# Altium PCB ELEC3300_DAP.PcbDoc
Units mm, origin at the board's own origin, x right, y up, seen from the top; angles counter-clockwise.
Board outline 77.34 x 94.36 mm, 2 copper layers (Top Layer, Bottom Layer); 75 components, 92 nets, 357 pads, 379 vias.
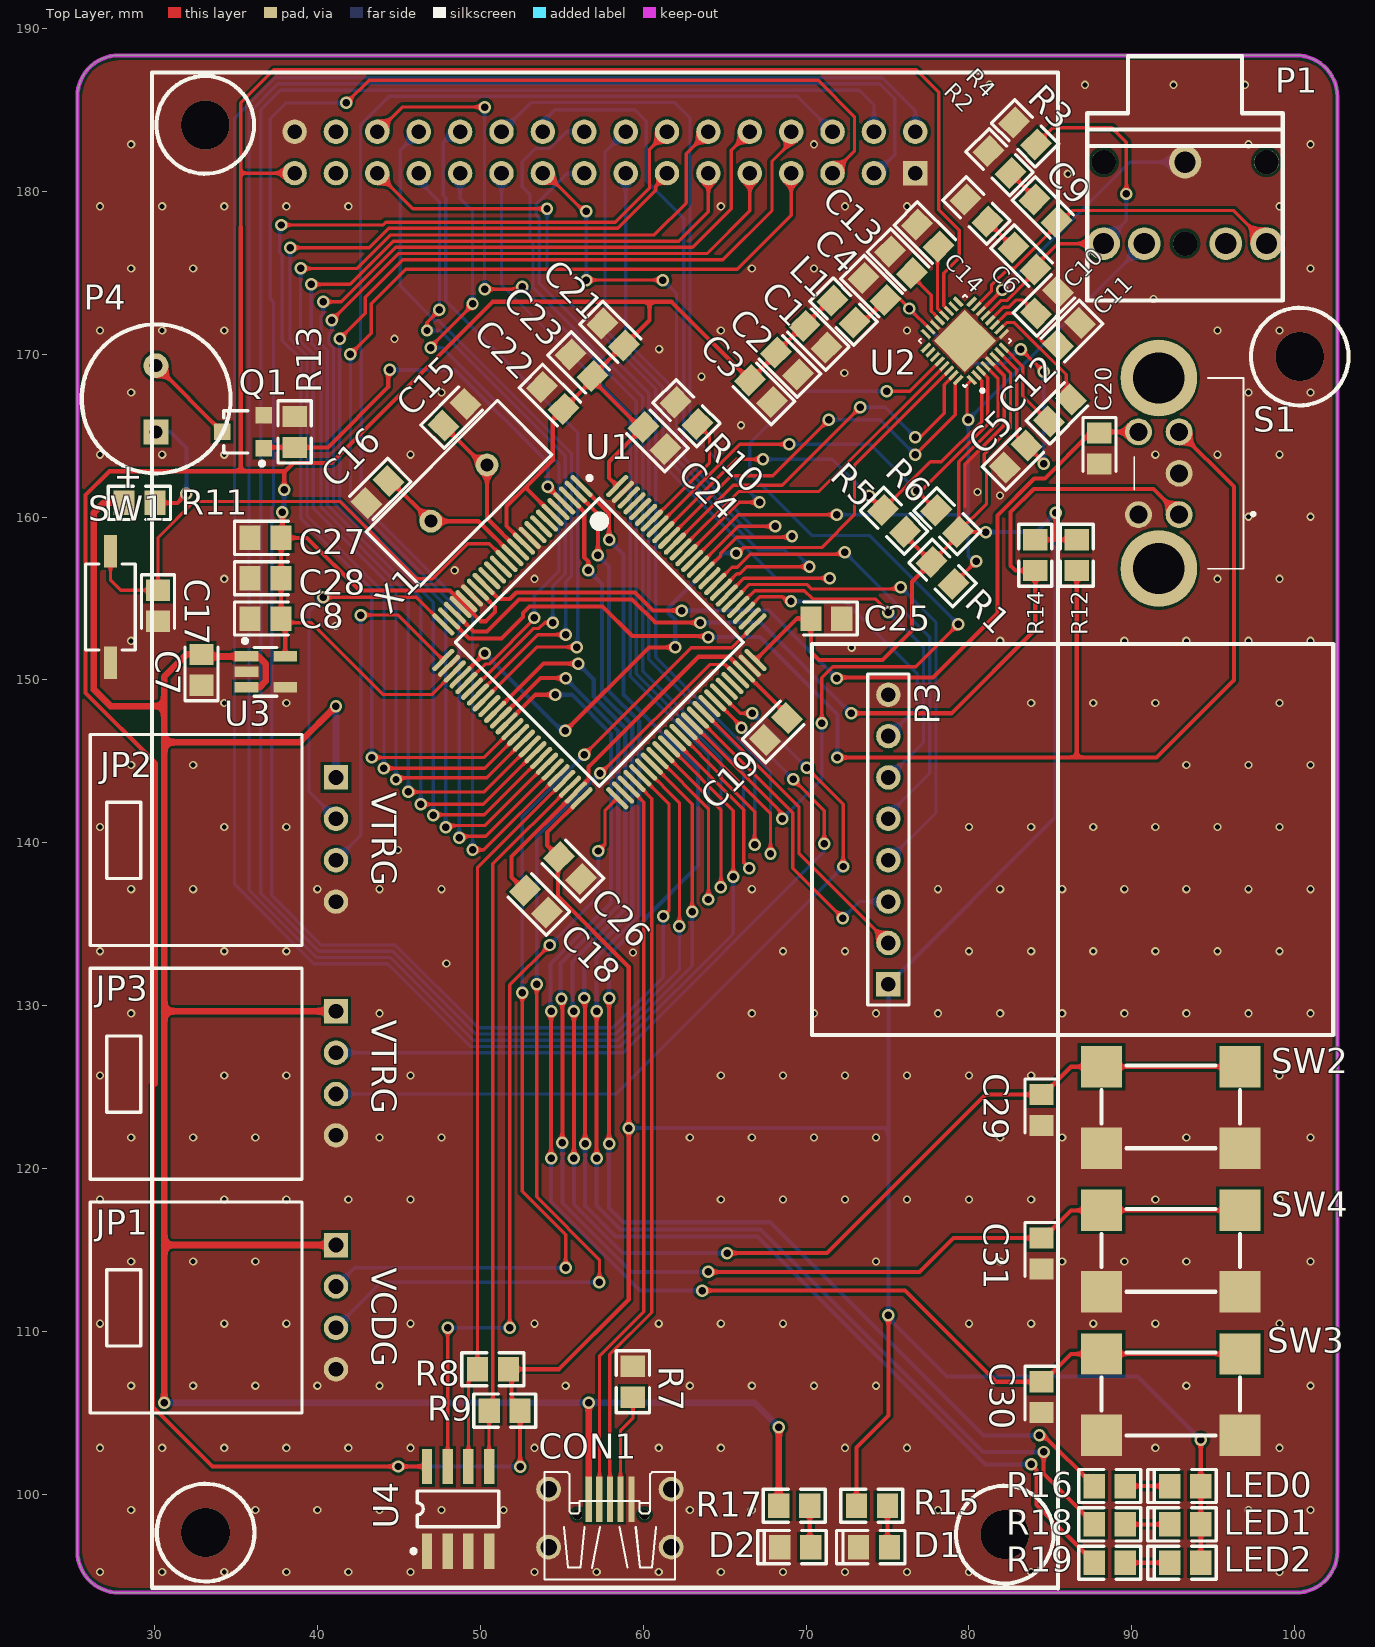
[diagram p0: Top Layer view]
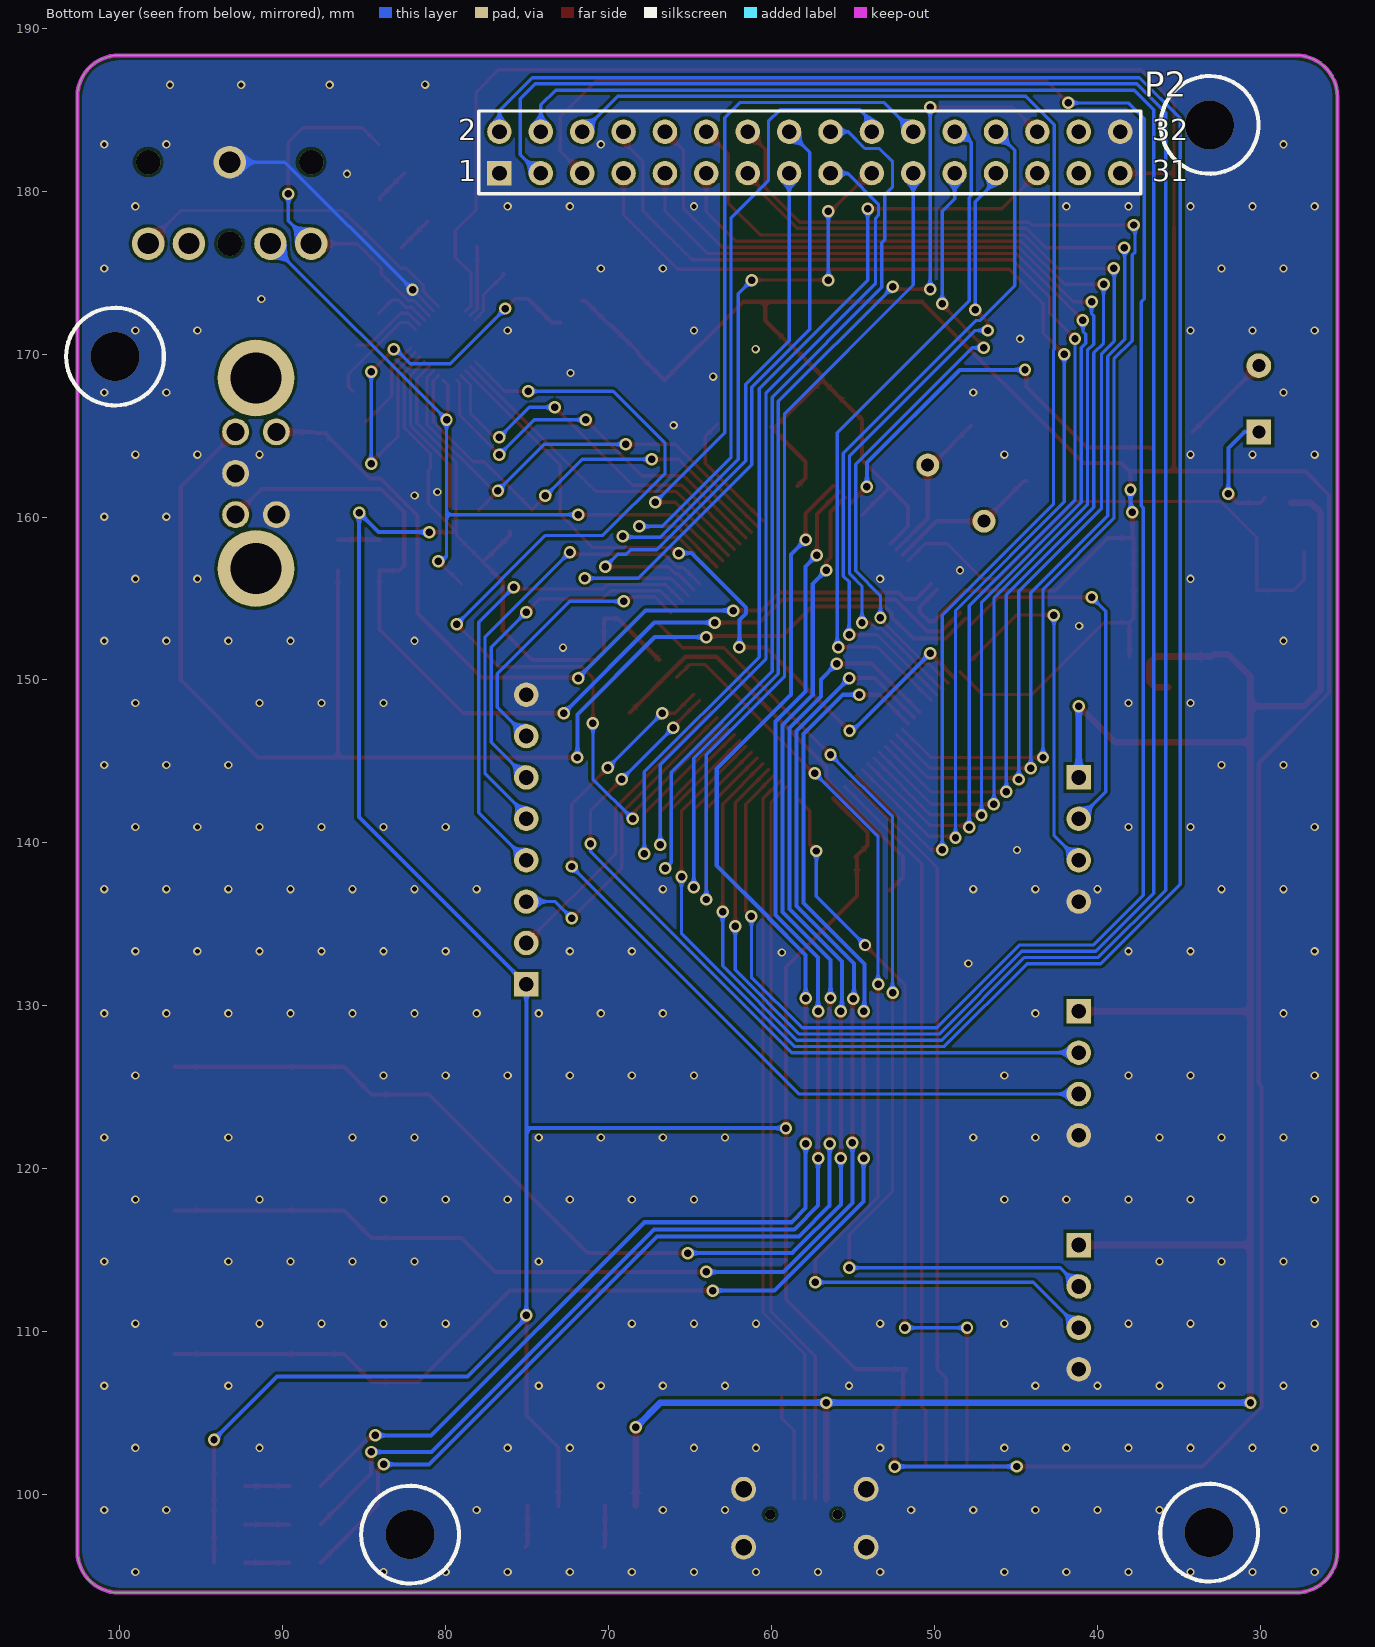
[diagram p1: Bottom Layer view, seen from below]
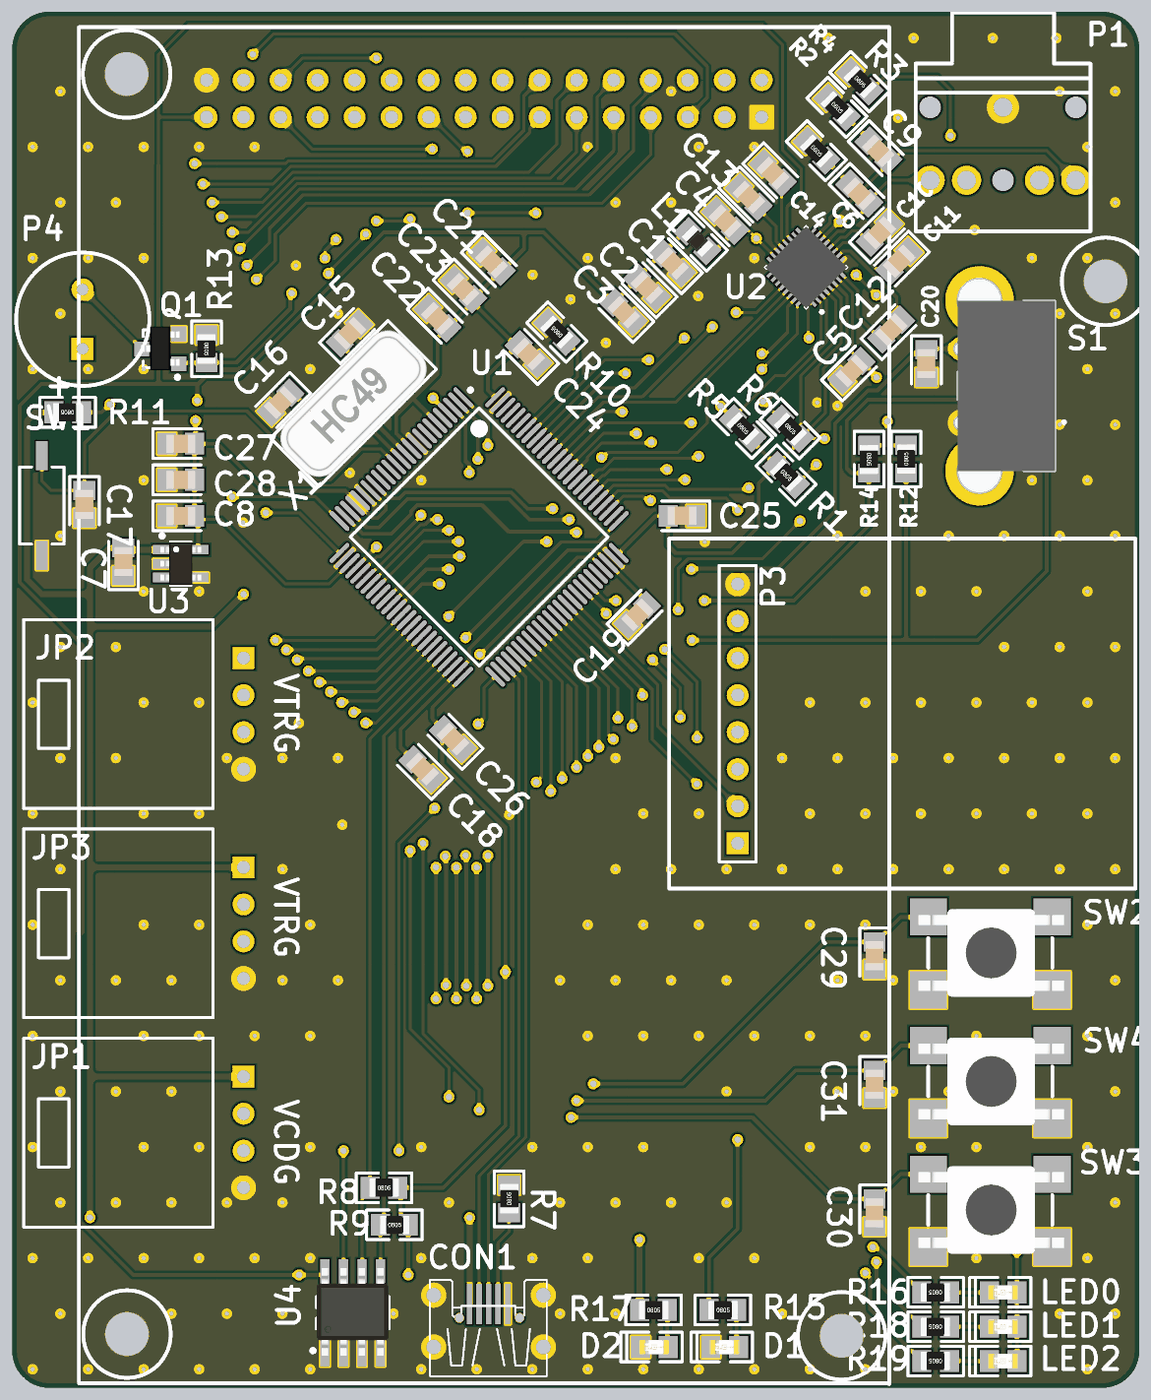
[diagram p2: 3D render of the assembled board from above, using the file's embedded part models]

## Layer stack, top to bottom
Top Solder: solder mask 0.0102, Solder Resist, Dk 3.5
Top Layer: signal copper 0.0356
Dielectric 1: dielectric 0.32, FR-4, Dk 4.8
Bottom Layer: signal copper 0.0356
Bottom Solder: solder mask 0.0102, Solder Resist, Dk 3.5

## Board outline
27.813,188.341 ccw(c27.813,185.801) 25.273,185.801 25.273,96.52 ccw(c27.813,96.52) 27.813,93.98 100.076,93.98 ccw(c100.076,96.52) 102.616,96.52 102.616,185.801 ccw(c100.076,185.801) 100.076,188.341

## Design rules (kind name [scope] priority, off if disabled: settings)
AssemblyTestPointUsage [All] p1 off:
AssemblyTestpoint [All] p1 off: testpointundercomponent=TRUE minsize=1.016 maxsize=2.54 preferedsize=1.524 minholesize=0 maxholesize=1.016 preferedholesize=0.813 testpointgrid=0.025 usegrid=TRUE gridtolerance=0 allowsidetop=TRUE allowsidebottom=TRUE
Clearance [All] p1: gap=0.178 ignorepadtopadclearanceinfootprint=FALSE except(0: Arc-Hole Track-Hole SMDPad-Hole THPad-Hole Via-Hole Fill-Hole Poly-Hole Region-Hole Text-Hole)
ComponentClearance [All] p1 off: gap=0.254 collisioncheckmode=3 verticalgap=0.254 showdistances=FALSE
DiffPairsRouting [All] p1 off: maxlimit=0.254 minlimit=0.254 mostfreqgap=0.254 toplayer_minwidth=0.381 toplayer_maxwidth=0.381 toplayer_prefwidth=0.381 bottomlayer_minwidth=0.381 bottomlayer_maxwidth=0.381 bottomlayer_prefwidth=0.381 maxuncoupledlength=12.7
FabricationTestPointUsage [All] p1 off: valid=0 allowmultiple=FALSE
FabricationTestpoint [All] p1 off: side=3 testpointundercomponent=TRUE minsize=1.016 maxsize=2.54 preferedsize=1.524 minholesize=0 maxholesize=1.016 preferedholesize=0.813 testpointgrid=0.025 allowsidetop=TRUE allowsidebottom=TRUE usegrid=TRUE gridtolerance=0
FanoutControl Fanout_BGA [IsBGA] p1 off: bgadir=Out bgaviamode=Centered fanoutstyle=Auto fanoutdirection=Alternating viagrid=0.025 // Fanout_BGA (Default Rule)
FanoutControl Fanout_LCC [IsLCC] p2 off: bgadir=Out bgaviamode=Centered fanoutstyle=Auto fanoutdirection=Alternating viagrid=0.025 // Fanout_LCC (Default Rule)
FanoutControl Fanout_SOIC [IsSOIC] p3 off: bgadir=Out bgaviamode=Centered fanoutstyle=Auto fanoutdirection=Alternating viagrid=0.025 // Fanout_SOIC (Default Rule)
FanoutControl Fanout_Small [(CompPinCount < 5)] p4 off: bgadir=Out bgaviamode=Centered fanoutstyle=Auto fanoutdirection=OutThenIn viagrid=0.025 // Fanout_Small (Default Rule)
FanoutControl Fanout_Default [All] p5 off: bgadir=Out bgaviamode=Centered fanoutstyle=Auto fanoutdirection=Alternating viagrid=0.025 // Fanout_Default (Default Rule)
Height [All] p1 off: minheight=0 maxheight=25.4 prefheight=12.7
HoleSize [All] p1: absolutevalues=TRUE maxlimit=7.62 minlimit=0.025 maxpercent=80.000 minpercent=20.000
HoleToHoleClearance [All] p1 off: gap=0.254 allowstackedmicrovias=TRUE
LayerPairs [All] p1 off: enforce=TRUE
MinimumSolderMaskSliver [All] p1 off: minsoldermaskwidth=0.254
NetAntennae [All] p1 off: netantennaetolerance=0
PasteMaskExpansion [All] p1 off: expansion=0
PlaneClearance [All] p1 off: clearance=0.508
PlaneConnect [All] p1 off: planeconnectstyle=Relief reliefexpansion=0.508 reliefentries=4 reliefconductorwidth=0.254 reliefairgap=0.254
PolygonConnect [All] p1: connectstyle=Direct reliefconductorwidth=0.254 reliefentries=4 polygonreliefangle="90 Angle" airgapwidth=0.254
RoutingCorners [All] p1 off: cornerstyle=45-Degree minsetback=2.54 maxsetback=2.54
RoutingLayers [All] p1 off: top layer_v5=TRUE bottom layer_v5=TRUE
RoutingPriority [All] p1 off: routingpriority=0
RoutingTopology [All] p1 off: topology=Shortest
RoutingVias [All] p1: holewidth=0.457 width=0.762 viastyle="Through Hole" minholewidth=0 minwidth=0 maxholewidth=0.457 maxwidth=0.762
SilkToBoardRegionClearance [All] p1 off:
SilkToSilkClearance [All] p1 off: silktosilkclearance=0.254
SilkToSolderMaskClearance [IsPad] p1 off: minsilkscreentomaskgap=0.254 clearancetoexposedcopper=TRUE
SolderMaskExpansion [All] p1 off: expansion=0.102
Width [All] p1: maxlimit=253.975 minlimit=0.178 preferedwidth=0.254
3 further rules are at their usual default settings.

## Components (designator, comment, footprint, x,y, rotation, side; value= is the part's Value field where it differs from the comment)
C1 "100nF" CC2012-0805 70.575,171.069 r135 top
C2 "100nF" CC2012-0805 68.834,169.418 r135 top
C3 "100nF" CC2012-0805 67.24,167.726 r135 top
C4 "4.7uF" CC2012-0805 74.205,174.003 r315 top
C5 "4.7uF" CC2012-0805 82.874,163.718 r45 top
C6 "100nF" CC2012-0805 83.399,175.873 r315 top
C7 "1uF" CC2012-0805 32.893,150.622 r90 top
C8 "1uF" CC2012-0805 36.83,153.772 r0 top
C9 "100nF" CC2012-0805 84.709,178.816 r315 top
C10 "2.2uF" CC2012-0805 84.791,173.179 r45 top
C11 "2.2uF" CC2012-0805 86.151,171.237 r225 top
C12 "2.2uF" CC2012-0805 85.582,166.548 r45 top
C13 "4.7uF" CC2012-0805 75.819,175.641 r315 top
C14 "4.7uF" CC2012-0805 77.47,177.292 r315 top
C15 "20pF" CC2012-0805 48.424,166.28 r45 top
C16 "20pF" CC2012-0805 43.688,161.544 r225 top
C17 "100nF" CC2012-0805 30.226,154.559 r270 top
C18 "2.2uF" CC2012-0805 53.421,136.398 r135 top
C19 "2.2uF" CC2012-0805 68.162,146.984 r45 top
C20 "100nF" CC2012-0805 88.011,164.211 r270 top
C21 "1uF" CC2012-0805 58.166,171.196 r315 top
C22 "100nF" CC2012-0805 54.453,167.317 r315 top
C23 "100nF" CC2012-0805 56.221,169.317 r315 top
C24 "100nF" CC2012-0805 60.706,164.846 r135 top
C25 "100nF" CC2012-0805 71.247,153.772 r180 top
C26 "100nF" CC2012-0805 55.514,138.453 r135 top
C27 "100nF" CC2012-0805 36.83,158.722 r0 top
C28 "100nF" CC2012-0805 36.83,156.247 r0 top
C29 "100nF" CC2012-0805 84.455,123.609 r270 top
C30 "100nF" CC2012-0805 84.455,105.98 r270 top
C31 "100nF" CC2012-0805 84.455,114.794 r270 top
CON1 "USB" USB-UB-S-HML 59.282,99.474 r90 top
D1 "LED" D0805 74.168,96.774 r180 top
D2 "LED" D0805 69.342,96.774 r180 top
JP1 "CONN0M" LOCKEDHDR-4W 41.148,111.506 r270 top
JP2 "CONN0M" LOCKEDHDR-4W 41.148,140.208 r270 top
JP3 "CONN0M" LOCKEDHDR-4W 41.148,125.857 r270 top
L1 "10uH" CL2012-0805 72.3,172.61 r315 top
LED0 "LED" D0805 93.279,100.525 r180 top (schematic designator LED1)
LED1 "LED" D0805 93.279,98.171 r180 top (schematic designator LED2)
LED2 "LED" D0805 93.279,95.817 r180 top (schematic designator LED3)
P1 "3.5mm Audio Jack" STX-3120-5B 93.265,181.784 r270 top
P2 "Header 16x2" HDR2X16 76.708,181.112 r180 bottom
P3 "Header 8" HDR1X8 75.057,131.318 r90 top
P4 "Buzzer" BUZ-9.0 30.099,167.259 r90 top
Q1 "AO3400" SO-G3/Z3.3 35.433,165.227 r90 top
R1 "10k" CR2012-0805 78.384,156.565 r315 top
R2 "10k" CR2012-0805 80.456,178.816 r315 top
R3 "100k" CR2012-0805 83.447,183.552 r315 top
R4 "10k" CR2012-0805 81.87,181.784 r315 top
R5 "10k" CR2012-0805 75.405,159.771 r315 top
R6 "10k" CR2012-0805 78.664,159.747 r315 top
R7 "10k" CR2012-0805 59.375,106.929 r90 top
R8 "10k" CR2012-0805 50.78,107.696 r0 top
R9 "10k" CR2012-0805 51.501,105.156 r0 top
R10 "10k" CR2012-0805 62.656,166.376 r135 top
R11 "33R" CR2012-0805 29.083,160.872 r180 top
R12 "10k" CR2012-0805 86.614,157.661 r90 top
R13 "10k" CR2012-0805 38.608,165.227 r270 top
R14 "10k" CR2012-0805 84.071,157.661 r270 top
R15 "2k" CR2012-0805 74.041,99.314 r0 top
R16 "2k" CR2012-0805 88.646,100.525 r180 top
R17 "5k" CR2012-0805 69.281,99.314 r0 top
R18 "2k" CR2012-0805 88.646,98.171 r180 top
R19 "2k" CR2012-0805 88.646,95.817 r180 top
S1 "EC11B15242AE" EC11B15242AE 93.853,162.687 r0 top
SW1 "RESET" "PUSH SWITCH 2-PIN" 27.305,154.479 r180 top
SW2 "RESET" "PUSH SWITCH" 88.138,121.261 r0 top
SW3 "RESET" "PUSH SWITCH" 88.138,103.632 r0 top
SW4 "RESET" "PUSH SWITCH" 88.138,112.447 r0 top
U1 "STM32F407VET6" STM-LQFP100_N 57.317,152.322 r315 top
U2 "WM8918" QFN40P400X400X80-33N 79.756,170.815 r135 top
U3 "LP5907" SOT-23-5 36.83,150.495 r270 top
U4 "AT24C02BN" SOP-8 46.736,96.52 r0 top
X1 "8MHz" BCY-W2/E4.7 48.693,161.471 r45 top

## Footprints (in the part's own frame and the unit in brackets; to place one, negate y for a bottom-side part, rotate by r counter-clockwise, add the part's x,y. Pads: shape width x height; smd on the part's side, far side on the other; paste and mask are expansions set on the pad)
BCY-W2/E4.7 [mm]
  round 1.4 hole 0.8: 1(-2.44,-0.002) 2(2.44,-0.002)
  silkscreen extent -5.7,-2.35 5.7,2.35, body extent -5.67,-2.32 5.68,2.33, height 3.6
BUZ-9.0 [mil]
  rect 60x60 hole 31.5: 1(-80,0)
  round 60 hole 31.5: 2(80,0)
  silkscreen extent -180,-181 180,179
CC2012-0805 [mm] "Chip Capacitor; Body 2.0 x 1.2 mm (LxW typ)"
  rect 1.3x1.5 smd: 1(-0.95,0) 2(0.95,0)
  silkscreen extent -1.91,-1.02 1.4,1.02, body extent -0.99,-0.64 1.01,0.62, height 0.58
CL2012-0805 [mm] "Chip Inductor; Body 2.0 x 1.3 mm (LxW typ)"
  rect 1.3x1.5 smd: 1(-0.95,0) 2(0.95,0)
  silkscreen extent -1.9,-1.02 1.91,1.02, body extent -1,-0.6 1,0.6, height 0.95
CR2012-0805 [mm] "Chip Resistor; Body 2.0 x 1.3 mm (LxW typ)"
  rect 1.3x1.5 smd: 1(-0.95,0) 2(0.95,0)
  silkscreen extent -1.91,-1.02 1.9,1.02, body extent -0.98,-0.63 1.02,0.63, height 0.58
D0805 [mm]
  rect 1.3x1.5 smd: 1(-0.95,0) 2(0.95,0)
  silkscreen extent -1.91,-1.02 2.3,1.02, body extent -0.98,-0.49 1.02,0.51, height 0.48
EC11B15242AE [mm]
  round 1.65 hole 1.1: 1(-0.95,-2.54) 2(-0.95,0) 3(-0.95,2.54) 4(-3.45,2.54) 5(-3.45,-2.54)
  round 4.71 hole 3.14: 6(-2.2,5.85) 7(-2.2,-5.85)
  silkscreen extent -3.7,-5.85 3.7,5.85, body extent -3.9,-7.32 3,7.32, height 13.1
HDR1X8 [mm] "Connector; Header; 4 Position"
  rect 1.5x1.5 hole 0.9: 1(0,0)
  round 1.5 hole 0.9: 2(2.54,0) 3(5.08,0) 4(7.62,0) 5(10.16,0) 6(12.7,0) 7(15.24,0) 8(17.78,0)
  silkscreen extent -1.27,-1.27 19.05,1.27
HDR2X16 [mm]
  rect 1.5x1.5 hole 0.9: 1(0,0)
  round 1.5 hole 0.9: 2(0,2.54) 3(2.54,0) 4(2.54,2.54) 5(5.08,0) 6(5.08,2.54) 7(7.62,0) 8(7.62,2.54) 9(10.16,0) 10(10.16,2.54) 11(12.7,0) 12(12.7,2.54) 13(15.24,0) 14(15.24,2.54) 15(17.78,0) 16(17.78,2.54) 17(20.32,0) 18(20.32,2.54) 19(22.86,0) 20(22.86,2.54) 21(25.4,0) 22(25.4,2.54) 23(27.94,0) 24(27.94,2.54) 25(30.48,0) 26(30.48,2.54) 27(33.02,0) 28(33.02,2.54) 29(35.56,0) 30(35.56,2.54) 31(38.1,0) 32(38.1,2.54)
  silkscreen extent -1.27,-1.27 39.37,3.81
LOCKEDHDR-4W [mm] "5-pin header with lock"
  rect 1.5x1.5 hole 0.9: 1(-3.81,0)
  round 1.5 hole 0.9: 2(-1.27,0) 3(1.27,0) 4(3.81,0)
  silkscreen extent -6.45,-15.09 6.5,-2.08
"PUSH SWITCH" [mm]
  rect 2.54x2.54 smd: 1(0,0) 1(8.5,0) 2(0,5) 2(8.5,5)
  silkscreen extent 0,0 8.51,5.08, body extent -0.68,-0.46 9.32,5.54, height 5.07
"PUSH SWITCH 2-PIN" [mm]
  rect 0.8x2 smd: 1(-0.001,-3.425) 2(-0.001,3.425)
  silkscreen extent -1.52,-2.64 1.52,2.64
QFN40P400X400X80-33N [mm]
  rrect25% 0.73x0.22 smd: 1(-1.99,1.4) 2(-1.99,1) 3(-1.99,0.6) 4(-1.99,0.2) 5(-1.99,-0.2) 6(-1.99,-0.6) 7(-1.99,-1) 8(-1.99,-1.4) 17(1.99,-1.4) 18(1.99,-1) 19(1.99,-0.6) 20(1.99,-0.2) 21(1.99,0.2) 22(1.99,0.6) 23(1.99,1) 24(1.99,1.4)
  rrect25% 0.22x0.73 smd: 9(-1.4,-1.99) 10(-1,-1.99) 11(-0.6,-1.99) 12(-0.2,-1.99) 13(0.2,-1.99) 14(0.6,-1.99) 15(1,-1.99) 16(1.4,-1.99) 25(1.4,1.99) 26(1,1.99) 27(0.6,1.99) 28(0.2,1.99) 29(-0.2,1.99) 30(-0.6,1.99) 31(-1,1.99) 32(-1.4,1.99)
  rect 2.7x2.7 smd paste-2: 33(0,0)
  silkscreen extent -3.02,-2 2,2, body extent -2,-2 2,2, height 0.75
SO-G3/Z3.3 [mil]
  rect 40x40 smd: 1(-40,-50) 2(40,-50) 3(0,50)
  silkscreen extent -82,-51 51,46, body extent -58,-52 60,52, height 43
SOP-8 [mil]
  rect 25x85 smd: 1(0,0) 2(50,0) 3(100,0) 4(150,0) 5(150,204.72) 6(100,204.72) 7(50,204.72) 8(0,204.72)
  silkscreen extent -37,-5 173,146, body extent -22,-13 171,223, height 67
SOT-23-5 [mm]
  rect 0.65x1.45 smd: 1(-0.95,-1.175) 2(0,-1.175) 3(0.95,-1.175) 4(0.95,1.202) 5(-0.95,1.202)
  silkscreen extent -2.03,-1.39 1.5,0.7, body extent -1.45,-1.39 1.45,1.41, height 1.45
STM-LQFP100_N [mm] "Thin QFP, 100-Leads, Body 14x14mm, Pitch 0.5mm, IPC Medium Density"
  oval 1.8x0.3 smd: 1(-7.55,6) 2(-7.55,5.5) 3(-7.55,5) 4(-7.55,4.5) 5(-7.55,4) 6(-7.55,3.5) 7(-7.55,3) 8(-7.55,2.5) 9(-7.55,2) 10(-7.55,1.5) 11(-7.55,1) 12(-7.55,0.5) 13(-7.55,0) 14(-7.55,-0.5) 15(-7.55,-1) 16(-7.55,-1.5) 17(-7.55,-2) 18(-7.55,-2.5) 19(-7.55,-3) 20(-7.55,-3.5) 21(-7.55,-4) 22(-7.55,-4.5) 23(-7.55,-5) 24(-7.55,-5.5) 25(-7.55,-6) 51(7.55,-6) 52(7.55,-5.5) 53(7.55,-5) 54(7.55,-4.5) 55(7.55,-4) 56(7.55,-3.5) 57(7.55,-3) 58(7.55,-2.5) 59(7.55,-2) 60(7.55,-1.5) 61(7.55,-1) 62(7.55,-0.5) 63(7.55,0) 64(7.55,0.5) 65(7.55,1) 66(7.55,1.5) 67(7.55,2) 68(7.55,2.5) 69(7.55,3) 70(7.55,3.5) 71(7.55,4) 72(7.55,4.5) 73(7.55,5) 74(7.55,5.5) 75(7.55,6)
  oval 0.3x1.8 smd: 26(-6,-7.55) 27(-5.5,-7.55) 28(-5,-7.55) 29(-4.5,-7.55) 30(-4,-7.55) 31(-3.5,-7.55) 32(-3,-7.55) 33(-2.5,-7.55) 34(-2,-7.55) 35(-1.5,-7.55) 36(-1,-7.55) 37(-0.5,-7.55) 38(0,-7.55) 39(0.5,-7.55) 40(1,-7.55) 41(1.5,-7.55) 42(2,-7.55) 43(2.5,-7.55) 44(3,-7.55) 45(3.5,-7.55) 46(4,-7.55) 47(4.5,-7.55) 48(5,-7.55) 49(5.5,-7.55) 50(6,-7.55) 76(6,7.55) 77(5.5,7.55) 78(5,7.55) 79(4.5,7.55) 80(4,7.55) 81(3.5,7.55) 82(3,7.55) 83(2.5,7.55) 84(2,7.55) 85(1.5,7.55) 86(1,7.55) 87(0.5,7.55) 88(0,7.55) 89(-0.5,7.55) 90(-1,7.55) 91(-1.5,7.55) 92(-2,7.55) 93(-2.5,7.55) 94(-3,7.55) 95(-3.5,7.55) 96(-4,7.55) 97(-4.5,7.55) 98(-5,7.55) 99(-5.5,7.55) 100(-6,7.55)
  silkscreen extent -7.67,-6.25 6.25,6.82, body extent -7,-7 7,7, height 1.6
STX-3120-5B [mm] "3.5mm Audio Jack, All Plastic PCB Mount, 5 Position Stereo"
  round 2 hole 1.3: 1(0,0) 2(5,5) 3(5,2.5) 4(5,-2.5) 5(5,-5)
  round 1.5 hole 1.5 unplated: ""(0,5) ""(0,-5) ""(5,0)
  silkscreen extent -6.5,-6 8.5,6
USB-UB-S-HML [mil]
  rect 110x15 smd: D+(10,52.05) D-(10,77.67) GND(10,-0.18) ID(10,26.43) VBUS(10,103.29)
  round 25 hole 25: P$5(-27.56,130.79) P$6(-27.56,-31.69)
  round 60 hole 40: TAB(-106.3,-96.06) TAB(-106.3,200.16) TAB(33.7,-96.06) TAB(33.7,200.16)
  silkscreen extent -185,-105 75,210

## Part data
C1 C2 C3 C4 C5 C6 C7 C8 C9 C10 C11 C12 C13 C14 C15 C16 C17 C18 C19 C20 C21 C22 C23 C24 C25 C26 C27 C28 C29 C30 C31: library part "Cap Semi", "Capacitor (Semiconductor SIM Model)", LatestRevisionDate=17-Jul-2002, LatestRevisionNote="Re-released for DXP Platform.", PackageReference=C1206, Published=8-Jun-2000, Publisher="Altium Limited"
CON1: library part "USB Series Micro-B"
D1 D2 LED0 LED1 LED2: "Typical RED GaAs LED", LatestRevisionDate=08-Jul-2005, LatestRevisionNote="Mech Layer 1 removed.", PackageReference=LED-1, Published=8-Jun-2000, Publisher="Altium Limited"
JP1 JP2 JP3: library part "Header 4", "Header, 4-Pin", Publisher="Altium Limited", Revision="17-Jul-2002: Re-released for DXP Platform."
L1: library part Inductor, "Inductor", Published=8-Jun-2000, Publisher="Altium Limited", Revision="July-2002: Re-released for DXP Platform."
P1: library part "Audio Jack 3P", "Conductor Jack with 2 break contacts (normals) and 2 auxiliary make contacts"
P3: "Header, 8-Pin", LatestRevisionDate=17-Jul-2002, LatestRevisionNote="Re-released for DXP Platform.", Publisher="Altium Limited"
Q1: "N-Channel MOSFET", Published=8-Jun-2000, Publisher="Altium Limited", Revision="July-2002: Re-released for DXP Platform."
R1 R2 R3 R4 R5 R6 R7 R8 R9 R10 R11 R12 R13 R14 R15 R16 R17 R18 R19: library part "Res Semi", "Semiconductor Resistor", LatestRevisionDate=17-Jul-2002, LatestRevisionNote="Re-released for DXP Platform.", Published=8-Jun-2000, Publisher="Altium Limited"
S1: "Switch", Manufacturer_Name=ALPS, Mouser Part Number=688-EC11B15242AE, Height=13mm, Manufacturer_Part_Number=EC11B15242AE, Mouser Price/Stock=http://www.mouser.com/Search/ProductDetail.aspx?qs=PoKhxlfUXjIm2pRMScFQOQ%3d%3d
SW1 SW2 SW3 SW4: library part SW-SPST, "Single-Pole, Single-Throw Switch", Published=24-Mar-1999, Publisher="Altium Limited", Revision="July-2002: Re-released for DXP Platform."
U1: "ARM Cortex-M4 32-bit MCU+FPU, 210 DMIPS, 512 kB Flash, 192 kB Internal RAM, 82 I/Os, 100-pin LQFP, -40 to 85 degC, Tray", I/Os (High Current)=82, Manufacturer=STMicroelectronics, Operating Frequency(F) (Processor speed) (MHz)=168, Supplier Part Number 1=497-12075-ND, Supply Voltage(Vcc) max (V)=3.6, Supply Voltage(Vcc) min (V)=1.8, ComponentLink1Description="Manufacturer URL", ComponentLink1URL=http://www.st.com/web/en/home.html, ComponentLink2Description=Datasheet, ComponentLink2URL=http://www.st.com/st-web-ui/static/active/en/resource/technical/document/datasheet/DM00037051.pdf, ComponentLink3Description="Package Specification", ComponentLink3URL=http://www.st.com/st-web-ui/static/active/en/resource/technical/document/data_brief/DM00071938.pdf, Core="ARM Cortex-M4", D/A Converter=2x12-bit, DatasheetVersion="Rev. 4", FLASH Size (Prog) (kB)=512, Internal RAM Size (kB)=192, Mounting Technology="Surface Mount", PackageDescription="100-Pin Low Profile Quad Flat Package, 14 x 14 mm Body, 0.5 mm Pitch", PackageReference=LQFP100, PackageVersion="Rev. 1, 06/2013", Packing=Tray, PartNumber=STM32F407VET6, Supplier 1=Digi-Key, Supplier 2=Farnell, Supplier 3=Newark, Supplier 4=Mouser, Supplier Part Number 2=2064367, Supplier Part Number 3=73T2332, Supplier Part Number 4=511-STM32F407VET6
U2: "Ultra Low Power Stereo DAC with Headphone Driver, 3 Line Inputs, All standard sample rates from 8 kHz to 96 kH"
U3: "LDO / Input: 2.2V to 5.5V / Output: 3.3V 250mA / Enable: high volt-> turns on"
U4: "Two-wire Serial EEPROM"
X1: library part XTAL, "Crystal Oscillator", Published=8-Jun-2000, Publisher="Altium Limited", Revision="July-2002: Re-released for DXP Platform."

## Via types
v1: diameter 0.508, hole 0.305, Top Layer to Bottom Layer, 234 vias
v2: diameter 0.762, hole 0.457, Top Layer to Bottom Layer, 141 vias
v3: diameter 3, hole 3, Top Layer to Bottom Layer, 4 vias

## Nets (pads, with @x,y where several pads share a name; then routed paths per layer and width w, separated by ;. In a path a pad name is that pad's centre, name@x,y a point inside that pad or via, vN(x,y) a via of type N, cw(c..) or ccw(c..) an arc to the next point about the centre after c; other vN are vias at no path point)
3.3V: C1.2 C2.2 C3.2 C8.2 C21.2 C22.2 C23.2 C24.2 C25.2 C26.2 C27.2 C28.2 L1.1 LED0.1 LED1.1 LED2.1 P2.31 P3.1 R1.1 R5.2 R6.2 R8.2 R9.2 R12.2 R14.1 R15.1 U1.6 U1.11 U1.19 U1.21 U1.22 U1.28 U1.50 U1.75 U1.100 U2.4 U2.6 U2.19 U3.5 U4.8 | length 514.6
  Top Layer w0.203: 35.306,177.81 35.306,181.112 ; C8.2@38.032,153.52 39.627,153.52 44.042,149.105 47.029,149.105 U1.28 ; P2.31 35.306,181.112 ; R1.1 79.336,158.86 R6.2 ; U2.19 78.773,172.658 78.452,172.979 78.452,174.971 79.411,175.93 79.411,177.599 78.142,178.868 78.142,186.08 76.77,187.452 37.338,187.452 35.306,185.42 35.306,181.112 ; v2(81.022,159.075) R6.2 ; U2.4 81.787,168.501 81.787,165.794 79.375,163.382 R6.2@79.375,159.115 ; U2.6 82.549,168.871 82.549,165.479 80.933,163.863 80.933,163.001 81.081,162.853 81.081,160.821 R6.2@79.375,159.115 ; R6.2 R6.2@79.375,159.115
  Top Layer w0.254: 35.306,177.81 35.306,162.814 ; v2(37.859,160.296) 37.859,158.8 C27.2 ; v2(37.973,161.671) 37.973,162.755 38.032,162.814 ; U3.5 38.032,153.52 C8.2 C28.2 C27.2 ; U4.8 46.732,101.723 v2(44.962,101.723) 33.561,101.723 29.921,105.364 29.921,125.038 30.099,125.215 30.099,144.89 25.781,149.208 25.781,161.351 27.244,162.814 35.306,162.814 ; U1.19 50.918,154.479 50.918,154.177 50.35,153.609 50.02,153.609 48.144,155.485 42.607,155.485 39.37,158.722 C27.2 ; v2(52.451,101.72) R9.2 51.928,105.679 51.928,107.498 R8.2 54.847,107.696 59.12,111.969 v2(59.12,122.493) 59.12,132.388 54.771,136.736 54.771,139.054 C26.2 54.113,139.853 54.113,140.633 U1.50 ; U1.11 52.685,158.381 51.625,159.441 51.625,160.665 52.774,161.815 52.863,161.904 ; U1.6 52.863,161.726 52.863,161.904 ; U1.100 57.912,162.405 57.912,163.396 C24.2 59.788,165.518 C23.2@56.893,168.413 ; U1.75 69.444,153.772 C25.2 70.297,151.723 70.793,151.226 74.697,151.226 76.505,153.034 76.505,156.029 R1.1 76.076,158.873 R5.2 ; L1.1 71.444,173.281 C1.2 69.813,171.741 C2.2 68.162,169.992 C3.2 61.754,173.212 60.394,173.212 ; R15.1 73.091,102.895 75.057,104.861 v2(75.057,110.998) ; R14.1 85.322,158.611 ; v2@85.322,160.252 85.322,158.611 ; R12.2 85.322,158.611 ; LED2.1 LED1.1 LED0.1 v2(94.229,103.373) ; 35.306,162.814 38.032,162.814 ; 38.032,162.814 38.54,163.322 40.869,163.322 50.759,173.212 60.394,173.212 ; 52.863,161.904 54.453,163.494 54.453,165.973 C22.2 C23.2@56.893,168.413 ; C23.2@56.893,168.413 C23.2 58.772,170.524 C21.2 60.394,172.081 60.394,173.212
  Bottom Layer w0.254: v2(37.859,160.296) 37.956,160.394 37.956,160.892 37.973,160.909 v2(37.973,161.671) ; v2(44.962,101.723) 52.447,101.723 v2(52.451,101.72) ; v2(59.12,122.493) 74.865,122.493 75.057,122.301 ; v2(81.022,159.075) 84.13,159.075 85.307,160.253 v2(85.323,160.253) 85.323,141.584 P3.1 75.057,122.301 ; v2(94.229,103.373) 90.363,107.239 78.661,107.239 75.154,110.746 75.154,110.901 v2(75.057,110.998) 75.057,122.301
5V: C7.2 CON1.VBUS JP1.1 JP2.1 JP3.1 R11.2 R17.1 U3.1 U3.3 | length 157.7
  Top Layer w0.406: R11.2 26.887,160.872 26.289,160.274 26.289,149.418 27.309,148.398 30.607,148.398 ; v2(30.607,105.648) 30.607,115.316 ; U3.3 36.449,149.545 36.83,149.926 36.83,151.003 36.388,151.445 U3.1 33.02,151.445 C7.2 31.969,151.572 30.607,150.21 30.607,148.398 ; JP1.1 30.607,115.316 ; JP3.1 30.607,129.667 ; v2(41.148,148.398) 38.927,146.177 30.607,146.177 ; CON1.VBUS v2(56.658,105.648) ; R17.1 v2(68.331,104.135) ; 30.607,115.316 30.607,129.667 ; 30.607,129.667 30.607,146.177 ; 30.607,146.177 30.607,148.398
  Bottom Layer w0.406: v2(30.607,105.648) v2(56.658,105.648) 66.818,105.648 v2(68.331,104.135) ; JP2.1 v2(41.148,148.398)
Button_0: C29.1 SW2.2 U1.35 | length 88.9
  Top Layer w0.254: U1.35 53.876,151.003 v2(56.007,151.003) ; v2(55.753,120.65) v2(55.753,129.667) ; v2(65.151,114.823) 71.288,114.823 81.023,124.559 C29.1 84.555,124.559 86.258,126.261 88.138,126.261 SW2.2@96.638,126.262
  Bottom Layer w0.254: v2(55.753,120.65) 55.753,117.807 58.737,114.823 v2(65.151,114.823) ; v2(55.753,129.667) 55.677,129.743 55.677,132.718 58.902,135.943 58.902,147.051 56.972,148.981 56.972,150.038 v2(56.007,151.003)
Button_1: C31.1 SW4.2 U1.36 | length 84.9
  Top Layer w0.254: U1.36 53.694,150.114 v2(55.245,150.114) ; v2(54.991,130.429) 55.042,130.378 v2(55.042,121.589) ; v2(64.008,113.665) 76.962,113.665 79.041,115.744 C31.1 84.555,115.744 86.258,117.447 88.138,117.447 SW4.2@96.638,117.447
  Bottom Layer w0.254: v2(54.991,130.429) 54.94,130.48 54.94,132.592 58.47,136.122 58.47,146.872 55.245,150.097 v2(55.245,150.114) ; v2(55.042,121.589) 55.042,117.908 59.285,113.665 v2(64.008,113.665)
Button_2: C30.1 SW3.2 U1.37 | length 86
  Top Layer w0.254: U1.37 53.386,149.098 v2(54.61,149.098) ; v2(54.356,120.65) v2(54.356,129.667) ; v2(63.627,112.522) 76.073,112.522 81.666,106.929 C30.1 84.555,106.929 86.258,108.632 88.138,108.632 SW3.2@96.638,108.632
  Bottom Layer w0.254: v2(54.356,120.65) 54.356,117.983 59.817,112.522 v2(63.627,112.522) ; v2(54.356,129.667) 54.305,129.718 54.305,132.567 58.038,136.301 58.038,146.686 55.626,149.098 v2(54.61,149.098)
Buzzer: Q1.1 R13.2 U1.4 | length 25.3
  Top Layer w0.254: Q1.1 36.769,164.277 R13.2 40.655,164.277 44.353,167.975 44.353,168.94 v2(44.45,169.037) ; v2(54.152,161.851) U1.4
  Bottom Layer w0.254: v2(44.45,169.037) 48.454,169.037 54.152,163.339 v2(54.152,161.851)
CODEC_I2C1_SCL: R5.1 U1.92 U2.2 | length 27.9
  Top Layer w0.203: U1.92 65.712,163.546 v2(67.358,163.546) ; v2(73.891,161.301) 73.891,161.285 R5.1 74.733,160.49 77.636,163.394 78.308,163.394 80.777,165.862 80.777,168.368 80.456,168.689 U2.2
  Bottom Layer w0.203: v2(67.358,163.546) 71.619,163.546 73.863,161.301 v2(73.891,161.301)
CODEC_I2C1_SDA: R6.1 U1.93 U2.3 | length 30.4
  Top Layer w0.203: U1.93 65.924,164.465 v2(68.961,164.465) ; R6.1 76.798,161.612 v2(76.798,161.622) 76.905,161.729 77.182,161.729 81.158,165.704 81.158,168.553 80.739,168.972 U2.3
  Bottom Layer w0.203: v2(68.961,164.465) 73.955,164.465 v2(76.798,161.622)
CODEC_I2S3_CK: U1.89 U2.29 | length 20.8
  Top Layer w0.203: U1.89 65.857,161.569 70.793,161.569 U2.29
CODEC_I2S3_ext_SD: U1.90 U2.31 | length 24
  Top Layer w0.203: U1.90 65.531,161.95 68.532,161.95 v2(73.324,166.742) ; v2(76.716,164.889) 77.013,164.889 78.486,166.362 78.486,168.116 79.056,168.686 U2.31
  Bottom Layer w0.203: v2(73.324,166.742) 74.863,166.742 v2(76.716,164.889)
CODEC_I2S3_MCK: U1.64 U2.28 | length 59.8
  Top Layer w0.203: U1.64 68.532,141.815 v2(68.532,141.478) ; v2(70.97,147.337) 70.97,150.136 71.654,150.82 76.737,150.82 v2(79.336,153.418) ; v2(74.947,167.72) 76.378,167.72 U2.28
  Bottom Layer w0.203: v2(68.532,141.478) 70.97,143.916 v2(70.97,147.337) ; v2(74.947,167.72) 69.732,167.72 66.545,164.533 66.545,162.681 70.353,158.873 73.881,158.873 v2(79.336,153.418)
CODEC_I2S3_SD: U1.91 U2.32 | length 24.7
  Top Layer w0.203: U1.91 65.404,162.531 67.961,162.531 v2(71.403,165.973) ; v2(76.716,163.824) 76.716,163.838 79.158,166.28 79.158,168.238 U2.32
  Bottom Layer w0.203: v2(71.403,165.973) 74.567,165.973 v2(76.716,163.824)
CODEC_I2S3_WS: U1.29 U2.30 | length 45.5
  Top Layer w0.203: v2(65.712,157.786) 65.849,157.786 66.19,158.127 70.97,158.127 72.972,160.128 72.972,163.182 U2.30
  Top Layer w0.254: U1.29 v2(50.269,151.638) ; v2(55.22,146.872) 60.352,152.005 v2(61.976,152.005)
  Bottom Layer w0.254: v2(50.269,151.638) 55.035,146.872 v2(55.22,146.872) ; v2(61.976,152.005) 61.976,153.685 61.573,154.087 61.573,154.437 64.922,157.786 v2(65.712,157.786)
EEPROM_I2C2_SCL: R8.1 U1.47 U4.6 | length 44.5
  Top Layer w0.203: U4.6 49.281,101.725 49.281,107.148 R8.1 49.83,138.471 U1.47
EEPROM_I2C2_SDA: R9.1 U1.48 U4.5 | length 43.8
  Top Layer w0.203: U4.5 50.546,105.151 R9.1 50.78,105.385 50.78,138.714 U1.48
EEPROM_Write_Protect: U1.51 U4.7 | length 47.6
  Top Layer w0.203: U4.7 v2(48.006,110.236) ; v2(51.816,110.236) 51.816,131.28 v2(54.267,133.731) ; v2(57.252,139.503) 57.658,139.908 57.658,141.986 U1.51
  Bottom Layer w0.203: v2(48.006,110.236) v2(51.816,110.236) ; v2(54.267,133.731) 57.252,136.716 v2(57.252,139.503)
FSMC_A16: P2.21 U1.58 | length 59.8
  Top Layer w0.203: U1.58 64.008,142.096 v2(64.008,136.525)
  Bottom Layer w0.203: P2.21 51.308,174.244 59.207,166.345 59.207,150.219 64.008,145.419 v2(64.008,136.525)
FSMC_D0: P2.18 U1.61 | length 63.4
  Top Layer w0.203: U1.61 66.183,142.042 66.183,138.787 v2(66.517,138.453)
  Bottom Layer w0.203: P2.18 55.304,183.652 54.274,182.623 53.387,182.623 52.578,181.813 52.578,180.266 53.061,179.784 53.061,177.027 53.238,176.849 53.238,174.092 59.969,167.361 59.969,150.535 66.167,144.337 66.167,138.803 v2(66.517,138.453)
FSMC_D1: P2.17 U1.62 | length 57.2
  Top Layer w0.203: U1.62 64.77,144.162 64.77,143.994 66.843,141.921 v2(66.843,139.897)
  Bottom Layer w0.203: P2.17 56.366,181.09 55.333,181.09 53.442,179.199 53.442,178.522 53.619,178.344 53.619,174.346 60.35,167.615 60.35,151.283 66.843,144.79 v2(66.843,139.897)
FSMC_D2: P2.16 U1.81 | length 42.3
  Top Layer w0.203: U1.81 66.191,156.247 v2(71.464,156.247)
  Bottom Layer w0.203: P2.16 57.658,182.382 57.658,171.53 61.214,167.974 61.214,163.218 68.185,156.247 v2(71.464,156.247)
FSMC_D3: P2.15 U1.82 | length 36.3
  Top Layer w0.203: U1.82 65.759,156.521 65.92,156.521 66.353,156.954 v2(70.213,156.954)
  Bottom Layer w0.203: P2.15 58.928,170.815 61.595,168.148 61.595,163.465 67.061,158 68.651,158 68.93,157.72 69.447,157.72 v2(70.213,156.954) v2@70.358,157.099
FSMC_D4: P2.14 U1.38 | length 71.9
  Top Layer w0.203: v2(37.78,177.927) 44.042,177.927 44.216,178.101 58.283,178.101 60.394,180.213 60.394,182.579 P2.14 ; v2(43.342,145.243) 50.238,145.243 U1.38
  Bottom Layer w0.203: v2(37.78,177.927) 37.694,177.841 37.694,176.256 37.859,176.091 37.859,170.834 38.989,169.703 38.989,159.919 43.342,155.565 v2(43.342,145.243)
FSMC_D5: P2.13 U1.39 | length 68.7
  Top Layer w0.203: v2(38.354,176.53) 43.184,176.53 44.374,177.72 58.44,177.72 60.775,180.055 60.775,180.313 61.468,181.006 P2.13 ; v2(44.091,144.583) 50.285,144.583 U1.39
  Bottom Layer w0.203: v2(38.354,176.53) 38.329,176.505 38.329,170.903 39.37,169.861 39.37,160.077 44.091,155.356 v2(44.091,144.583)
FSMC_D6: P2.12 U1.40 | length 72.9
  Top Layer w0.203: v2(38.989,175.26) 42.453,175.26 44.509,177.317 60.695,177.317 62.656,179.277 62.656,182.3 P2.12 ; v2(44.831,143.891) 44.934,143.994 50.403,143.994 U1.40
  Bottom Layer w0.203: v2(38.989,175.26) 38.966,175.237 38.966,170.804 39.751,170.019 39.751,160.532 44.831,155.452 v2(44.831,143.891)
FSMC_D7: P2.11 U1.41 | length 70.8
  Top Layer w0.203: v2(39.627,174.283) 42.015,174.283 44.667,176.936 62.197,176.936 64.008,178.746 P2.11 ; v2(45.593,143.129) 50.245,143.129 U1.41
  Bottom Layer w0.203: v2(39.627,174.283) 39.627,170.682 40.234,170.075 40.234,160.588 45.593,155.229 v2(45.593,143.129)
FSMC_D8: P2.10 U1.42 | length 74.3
  Top Layer w0.203: v2(40.363,173.212) 41.482,173.212 44.825,176.555 63.035,176.555 65.404,178.923 65.404,182.509 P2.10 ; v2(46.355,142.367) 50.19,142.367 U1.42
  Bottom Layer w0.203: v2@40.234,173.083 40.363,172.954 40.363,172.488 40.234,172.359 40.234,170.614 40.615,170.233 40.615,160.746 46.355,155.005 v2(46.355,142.367)
FSMC_D9: P2.9 U1.43 | length 71.8
  Top Layer w0.203: v2(40.894,172.085) 44.983,176.174 63.922,176.174 66.548,178.8 P2.9 ; v2(47.117,141.707) 47.142,141.732 50.262,141.732 U1.43
  Bottom Layer w0.203: v2@40.812,171.909 40.894,171.827 40.894,171.391 40.718,171.216 40.718,170.668 40.996,170.391 40.996,160.904 47.117,154.782 v2(47.117,141.707)
FSMC_D10: P2.8 U1.44 | length 76.2
  Top Layer w0.203: v2(41.378,170.942) 42.938,172.502 42.938,173.494 45.237,175.793 64.888,175.793 67.912,178.816 67.912,181.836 69.088,183.012 P2.8 ; v2(47.879,140.97) 47.981,141.072 50.309,141.072 U1.44
  Bottom Layer w0.203: v2(41.378,170.942) 41.377,170.94 41.377,161.061 47.879,154.559 v2(47.879,140.97)
FSMC_D11: P2.7 U1.45 | length 74.2
  Top Layer w0.203: v2(42.037,169.989) 43.319,171.271 43.319,173.102 45.425,175.207 65.776,175.207 69.088,178.52 P2.7 ; v2(48.715,140.31) 48.816,140.411 50.356,140.411 U1.45
  Bottom Layer w0.203: v2(42.037,169.989) 42.037,160.94 48.715,154.262 v2(48.715,140.31)
FSMC_D12: P2.6 U1.46 | length 85.1
  Top Layer w0.203: v2(49.53,139.573) 50.225,139.573 U1.46
  Bottom Layer w0.203: v2(49.53,139.573) 49.53,153.986 42.697,160.818 42.697,170.262 42.658,170.301 42.658,184.079 44.406,185.826 69.454,185.826 P2.6
FSMC_D13: P2.5 U1.55 | length 131.5
  Top Layer w0.203: v2(41.783,185.42) 43.18,186.817 70.739,186.817 72.972,184.584 72.972,182.456 P2.5 ; U1.55 61.595,142.387 61.595,135.863 v2(61.241,135.509)
  Bottom Layer w0.203: v2(41.783,185.42) 38.1,185.42 37.12,184.44 37.12,173.399 37.313,173.206 37.313,160.684 37.198,160.57 37.198,136.792 40.259,133.731 44.796,133.731 49.876,128.651 58.135,128.651 61.241,131.757 v2(61.241,135.509)
FSMC_D14: P2.4 U1.56 | length 132.3
  Top Layer w0.203: U1.56 62.23,142.46 v2(62.23,134.874)
  Bottom Layer w0.203: v2(62.23,134.874) 62.23,132.207 58.293,128.27 49.719,128.27 44.639,133.35 40.101,133.35 36.538,136.913 36.538,185.009 37.736,186.207 73.254,186.207 74.168,185.293 P2.4
FSMC_D15: P2.3 U1.57 | length 140
  Top Layer w0.203: U1.57 63.009,142.387 v2(63.009,135.763)
  Bottom Layer w0.203: v2(63.009,135.763) 63.009,132.447 58.451,127.889 49.561,127.889 44.481,132.969 39.943,132.969 35.814,137.098 35.814,184.824 37.579,186.588 74.524,186.588 75.438,185.674 75.438,182.245 74.305,181.112 P2.3
FSMC_NE1: P2.22 U1.88 | length 43.9
  Top Layer w0.203: U1.88 65.904,160.909 v2(67.146,160.909)
  Bottom Layer w0.203: P2.22 53.101,185.445 61.951,185.445 62.878,184.518 62.878,165.177 v2(67.146,160.909)
FSMC_NOE: P2.19 U1.85 | length 39.4
  Top Layer w0.203: P2.19 54.014,181.112 56.365,178.762 v2(56.516,178.762) ; v2(56.516,174.547) v2(61.214,174.547) ; U1.85 64.753,157.637 64.753,157.786 65.735,158.768 69.088,158.768 v2(69.14,158.821)
  Bottom Layer w0.203: v2(56.516,174.547) v2(56.516,178.762) ; v2(61.214,174.547) 62.053,173.708 62.053,163.546 66.831,158.768 69.088,158.768 v2(69.14,158.821)
FSMC_NWE: P2.20 U1.86 | length 42.3
  Top Layer w0.203: U1.86 65.838,159.429 v2(68.116,159.429)
  Bottom Layer w0.203: P2.20 53.848,184.277 54.58,185.009 59.478,185.009 60.198,184.289 60.198,180.654 62.497,178.354 62.497,163.64 66.709,159.429 v2(68.116,159.429)
GND: C1.1 C2.1 C3.1 C4.1 C5.1 C7.1 C8.1 C10.2 C11.1 C13.1 C14.1 C15.2 C16.2 C17.2 C18.1 C19.1 C20.2 C21.1 C22.1 C23.1 C24.1 C25.1 C26.1 C27.1 C28.1 C29.2 C30.2 C31.2 CON1.GND CON1.TAB D1.2 D2.2 JP1.4 JP2.4 JP3.4 P1.1 P2.1 P2.32 P3.8 Q1.2 R2.1 R3.1 R4.1 R7.2 R10.2 R13.1 S1.2 S1.5 SW1.2 SW2.1 SW3.1 SW4.1 U1.10 U1.20 U1.27 U1.74 U1.99 U2.5 U2.9 U2.14 U2.22 U2.33 U3.2 U3.4 U4.1 U4.2 U4.3 U4.4 | length 26.6
  Top Layer w0.203: 79.756,160.635 79.756,163.225 82.168,165.637 82.168,168.686 U2.5 ; U2.14 v2(82.042,173.95)
  Bottom Layer w0.203: v2(82.042,173.95) 89.876,181.784 P1.1 P1.1@93.298,181.784
  other v1: 26.67,95.25 30.48,95.25 34.29,95.25 38.1,95.25 41.91,95.25 45.72,95.25 53.34,95.25 57.15,95.25 60.96,95.25 64.77,95.25 68.58,95.25 72.39,95.25 76.2,95.25 80.01,95.25 83.82,95.25 99.06,95.25 28.575,99.06 36.195,99.06 40.005,99.06 43.815,99.06 47.625,99.06 51.435,99.06 62.865,99.06 66.675,99.06 78.105,99.06 97.155,99.06 100.965,99.06 26.67,102.87 30.48,102.87 34.29,102.87 38.1,102.87 41.91,102.87 45.72,102.87 53.34,102.87 60.96,102.87 64.77,102.87 72.39,102.87 76.2,102.87 91.44,102.87 99.06,102.87 28.575,106.68 32.385,106.68 36.195,106.68 40.005,106.68 43.815,106.68 55.245,106.68 62.865,106.68 66.675,106.68 70.485,106.68 74.295,106.68 93.345,106.68 100.965,106.68 26.67,110.49 34.29,110.49 38.1,110.49 45.72,110.49 53.34,110.49 60.96,110.49 64.77,110.49 68.58,110.49 80.01,110.49 83.82,110.49 87.63,110.49 91.44,110.49 99.06,110.49 28.575,114.3 32.385,114.3 36.195,114.3 74.295,114.3 81.915,114.3 85.725,114.3 89.535,114.3 93.345,114.3 100.965,114.3 26.67,118.11 34.29,118.11 38.1,118.11 41.91,118.11 45.72,118.11 64.77,118.11 68.58,118.11 72.39,118.11 76.2,118.11 80.01,118.11 83.82,118.11 91.44,118.11 99.06,118.11 28.575,121.92 32.385,121.92 36.195,121.92 43.815,121.92 47.625,121.92 62.865,121.92 66.675,121.92 70.485,121.92 74.295,121.92 81.915,121.92 85.725,121.92 93.345,121.92 100.965,121.92 26.67,125.73 34.29,125.73 38.1,125.73 45.72,125.73 64.77,125.73 68.58,125.73 72.39,125.73 76.2,125.73 80.01,125.73 83.82,125.73 99.06,125.73 28.575,129.54 43.815,129.54 66.675,129.54 70.485,129.54 74.295,129.54 78.105,129.54 81.915,129.54 85.725,129.54 89.535,129.54 93.345,129.54 97.155,129.54 100.965,129.54 47.925,132.592 59.375,133.271 26.67,133.35 34.29,133.35 38.1,133.35 68.58,133.35 72.39,133.35 80.01,133.35 83.82,133.35 87.63,133.35 91.44,133.35 95.25,133.35 99.06,133.35 28.575,137.16 32.385,137.16 40.005,137.16 43.815,137.16 47.625,137.16 66.675,137.16 78.105,137.16 81.915,137.16 85.725,137.16 89.535,137.16 93.345,137.16 97.155,137.16 100.965,137.16 44.942,139.56 26.67,140.97 34.29,140.97 38.1,140.97 80.01,140.97 83.82,140.97 87.63,140.97 91.44,140.97 95.25,140.97 99.06,140.97 28.575,144.78 32.385,144.78 93.345,144.78 97.155,144.78 100.965,144.78 34.29,148.59 38.1,148.59 83.82,148.59 87.63,148.59 91.44,148.59 99.06,148.59 72.804,151.983 28.575,152.4 81.915,152.4 89.535,152.4 93.345,152.4 97.155,152.4 100.965,152.4 41.12,153.312 34.29,156.21 53.34,156.21 95.25,156.21 99.06,156.21 48.435,156.727 97.155,160.02 100.965,160.02 81.91,161.324 80.523,161.545 26.67,163.83 30.48,163.83 34.29,163.83 45.72,163.83 91.44,163.83 95.25,163.83 99.06,163.83 66.015,165.637 28.575,167.64 47.625,167.64 97.155,167.64 100.965,167.64 63.589,168.618 72.348,168.848 60.982,170.307 44.746,170.942 26.67,171.45 30.48,171.45 34.29,171.45 64.77,171.45 76.2,171.45 95.25,171.45 99.06,171.45 91.321,173.38 28.575,175.26 32.385,175.26 66.675,175.26 70.485,175.26 100.965,175.26 26.67,179.07 30.48,179.07 34.29,179.07 38.1,179.07 41.91,179.07 64.77,179.07 72.39,179.07 76.2,179.07 99.06,179.07 86.068,181.065 28.575,182.88 70.485,182.88 97.155,182.88 100.965,182.88 81.263,186.542 87.126,186.532 92.56,186.532 96.934,186.532
  other v3: 82.194,97.543 33.147,97.663 100.305,169.852 33.122,184.07
Headphone_L: C6.2 P1.5 R3.2 U2.13 | length 22.5
  Top Layer w0.203: U2.13 81.947,173.289 82.316,173.289 83.965,174.939 83.965,175.307 85.442,176.784 P1.5 P1.5@88.298,176.784 ; R3.2 85.135,183.896 88.773,183.896 89.662,183.007 v2(89.662,179.832)
  Bottom Layer w0.203: P1.5 89.662,178.181 v2(89.662,179.832)
Headphone_R: C9.2 P1.2 U2.15 | length 21.3
  Top Layer w0.203: U2.15 81.382,173.855 81.382,174.223 82.434,175.275 82.773,175.275 85.497,177.999 85.526,177.999 86.343,178.816 96.266,178.816 P1.2@98.298,176.784
Jack_detect: P1.4 R1.2 U1.87 U2.1 | length 47
  Top Layer w0.203: U1.87 65.849,160.147 v2(71.882,160.147) ; R1.2 79.056,155.897 v2(80.456,157.297) ; v2(79.954,165.973) 79.88,166.048 79.88,168.125 U2.1
  Bottom Layer w0.203: v2(71.882,160.147) 79.954,160.147 ; v2(80.456,157.297) 80.244,157.297 79.954,157.586 79.954,160.147 ; P1.4 v2(79.954,165.973) 79.954,160.147
LCD_!PERIRQ: P2.27 U1.63 | length 66.4
  Top Layer w0.203: P2.27 45.874,178.926 v2(54.102,178.926) ; U1.63 67.818,141.821 v2(67.818,139.342)
  Bottom Layer w0.203: v2(54.102,178.926) 54.102,174.547 60.766,167.883 60.766,151.406 67.818,144.354 v2(67.818,139.342)
LCD_BLK: P2.28 U1.59 | length 72.4
  Top Layer w0.203: P2.28 45.202,185.166 v2(50.269,185.166) ; v2(50.269,173.99) 52.442,173.99 v2(52.578,174.126) ; U1.59 64.777,142.034 v2(64.777,137.287)
  Bottom Layer w0.203: v2(50.269,173.99) v2(50.269,185.166) ; v2(52.578,174.126) 52.578,174.117 59.588,167.107 59.588,150.377 64.777,145.189 v2(64.777,137.287)
LCD_RST: P2.2 U1.60 | length 142.7
  Top Layer w0.203: U1.60 65.531,141.987 v2(65.531,137.916)
  Bottom Layer w0.203: v2(65.531,137.916) 65.531,134.43 58.609,127.508 49.403,127.508 44.323,132.588 39.786,132.588 34.925,137.449 34.925,184.474 37.421,186.969 74.681,186.969 76.708,184.943 P2.2
LED0: R16.2 U1.1 | length 86.4
  Top Layer w0.254: U1.1 57.912,160.213 v2(57.912,158.602) ; v2(57.912,121.538) v2(57.912,130.477) ; v2(84.328,103.632) 84.589,103.632 R16.2
  Bottom Layer w0.254: v2(57.912,121.538) 57.912,117.588 58.787,116.713 67.818,116.713 80.899,103.632 v2(84.328,103.632) ; v2(57.912,130.477) 57.912,133.121 60.197,135.406 60.197,135.435 63.373,138.61 63.373,144.526 58.801,149.098 58.801,157.713 v2(57.912,158.602)
LED1: R18.2 U1.2 | length 85.9
  Top Layer w0.254: U1.2 57.226,160.191 v2(57.226,157.661) ; v2(57.15,120.65) v2(57.15,129.667) ; v2(84.582,102.616) 84.582,101.285 R18.2
  Bottom Layer w0.254: v2(57.15,120.65) 57.15,117.74 58.609,116.281 67.209,116.281 80.875,102.616 v2(84.582,102.616) ; v2(57.15,129.667) 57.15,132.969 59.766,135.585 59.766,147.448 57.912,149.301 57.912,156.975 v2(57.226,157.661)
LED2: R19.2 U1.3 | length 88.1
  Top Layer w0.254: U1.3 56.388,160.322 56.388,157.529 56.642,157.275 v2(56.642,156.74) ; v2(56.388,130.48) 56.439,130.429 v2(56.439,121.538) v2@56.439,121.336 ; v2(83.82,101.854) 84.15,101.524 84.15,99.363 R19.2
  Bottom Layer w0.254: v2(56.388,130.48) 56.388,132.818 59.334,135.764 59.334,147.23 57.48,149.083 57.48,155.902 v2(56.642,156.74) ; v2(56.439,121.538) 56.439,117.732 58.322,115.849 67.031,115.849 81.026,101.854 v2(83.82,101.854)
LINEOUT_GND: U2.17
LINEOUT_L: U2.16
LINEOUT_R: U2.18
MICBIAS: C13.2 U2.21 | length 3.7
  Top Layer w0.203: C13.2 76.42,174.899 77.69,173.629 77.69,172.637 77.886,172.441 77.886,172.417 78.207,172.096 U2.21
NetC4_2: C4.2 C5.2 L1.2 U2.7 U2.23 | length 30.3
  Top Layer w0.203: C4.2 74.947,173.402 75.743,173.402 76.345,172.8 77.63,171.515 U2.23 ; U2.7 82.93,169.055 82.93,164.96 83.445,164.445 83.546,164.445 C5.2 84.582,163.353 v2(84.582,163.268) ; v2(83.185,170.307) v2(84.582,168.91)
  Top Layer w0.254: L1.2 73.483,171.938 C4.2
  Bottom Layer w0.203: v2(76.344,172.8) 79.726,169.418 82.169,169.418 83.058,170.307 v2(83.185,170.307) ; v2(84.582,163.268) v2(84.582,168.91)
NetC6_1: C6.1 R2.2 | length 2.3
  Top Layer w0.254: R2.2 C6.1
NetC9_1: C9.1 R4.2 | length 2.2
  Top Layer w0.254: R4.2 84.037,179.617 C9.1
NetC10_1: C10.1 U2.12 | length 3.7
  Top Layer w0.203: U2.12 82.112,172.888 82.453,172.888 82.883,173.318 83.308,173.318 C10.1
NetC11_2: C11.2 U2.11 | length 5
  Top Layer w0.203: U2.11 81.599,171.798 82.308,172.507 82.762,172.507 84.703,170.565 C11.2
NetC12_1: C12.1 U2.8 | length 5.7
  Top Layer w0.203: U2.8 83.311,169.24 83.311,167.431 84.865,165.877 C12.1
NetC12_2: C12.2 U2.10 | length 6.7
  Top Layer w0.203: U2.10 81.882,171.515 82.305,171.938 82.792,171.938 85.979,168.751 85.979,167.99 C12.2@85.709,167.72
NetC14_2: C14.2 U2.20 | length 4.5
  Top Layer w0.203: C14.2 78.071,176.55 78.071,172.795 78.49,172.375 U2.20
NetC15_1: C15.1 U1.12 X1.2 | length 9.6
  Top Layer w0.254: C15.1 50.165,163.195 X1.2 50.419,159.927 U1.12
NetC16_1: C16.1 U1.13 X1.1 | length 9.5
  Top Layer w0.254: C16.1 44.497,162.216 X1.1 49.895,159.744 U1.13
NetC17_1: C17.1 SW1.1 U1.14 | length 33.8
  Top Layer w0.203: SW1.1 27.306,156.146 27.943,155.509 C17.1 30.226,158.746 32.437,160.957 41.378,160.957 46.117,156.218 47.074,156.218 49.224,158.368 50.564,158.368 U1.14
NetC18_2: C18.2 C19.2 U1.49 U1.73 | length 26.2
  Top Layer w0.254: C18.2 51.928,137.891 51.928,139.155 U1.49 55.867,143.121 56.642,143.895 56.642,144.672 63.395,151.425 65.285,151.425 U1.73 68.701,148.009 C19.2@68.709,148.009
NetCON1_ID: CON1.ID R7.1 | length 6.6
  Top Layer w0.203: CON1.ID 58.611,103.911 59.375,104.675 R7.1
NetD1_1: D1.1 R15.2 | length 2.6
  Top Layer w0.254: R15.2 74.991,96.901 D1.1
NetD2_1: D2.1 R17.2 | length 2.6
  Top Layer w0.254: R17.2 70.231,96.835 D2.1
NetLED1_2: LED0.2 R16.1 | length 2.7
  Top Layer w0.254: R16.1 LED0.2
NetLED2_2: LED1.2 R18.1 | length 2.7
  Top Layer w0.254: R18.1 LED1.2
NetLED3_2: LED2.2 R19.1 | length 2.7
  Top Layer w0.254: R19.1 LED2.2
NetP4_1: P4.1 R11.1 | length 7.7
  Top Layer w0.254: R11.1@29.718,161.187 R11.1 31.419,160.872 v2(31.969,161.422)
  Bottom Layer w0.254: P4.1 30.988,165.227 31.969,164.246 v2(31.969,161.422)
NetP4_2: P4.2 Q1.3 | length 5.7
  Top Layer w0.254: P4.2 Q1.3
NetR10_1: R10.1 U1.94 | length 7.7
  Top Layer w0.203: U1.94 64.07,163.318 64.07,164.962 R10.1
Rot_Encoder_But: C20.1 S1.4 U1.18 | length 52.7
  Top Layer w0.254: U1.18 50.223,155.893 51.142,154.975 51.816,154.975 52.214,155.373 59.506,155.373 60.617,154.262 v2(62.368,154.262) ; v2(71.882,150.114) 71.921,150.153 77.799,150.153 81.742,154.096 81.742,160.104 84.009,162.371 84.655,162.371 87.445,165.161 C20.1 88.077,165.227 S1.4
  Bottom Layer w0.254: v2(62.368,154.262) 67.734,154.262 v2(71.882,150.114)
Rot_Encoder_TIM5_CH1: R14.2 S1.1 U1.23 | length 62.1
  Top Layer w0.254: U1.23 49.597,152.971 50.423,152.971 52.393,154.941 59.328,154.941 60.749,153.52 v2(63.5,153.52) ; v2(72.771,147.955) 78.92,147.955 84.071,153.106 R14.2 82.854,156.711 82.549,157.016 82.549,160.301 83.977,161.729 91.321,161.729 S1.1
  Bottom Layer w0.254: v2(63.5,153.52) 67.206,153.52 v2(72.771,147.955)
Rot_Encoder_TIM5_CH2: R12.1 S1.3 U1.24 | length 85.1
  Top Layer w0.254: U1.24 49.322,152.539 51.302,152.539 52.634,153.871 52.634,154.107 53.036,154.509 57.515,154.509 59.334,152.691 63.951,152.691 v2(64.008,152.634) ; v2(71.921,145.243) 86.614,145.243 ; R12.1 86.614,145.243 ; S1.3 96.266,161.864 96.266,149.987 91.522,145.243 86.614,145.243
  Bottom Layer w0.254: v2(64.008,152.634) 67.173,152.634 71.921,147.885 v2(71.921,145.243)
SDIO_CK: P3.4 U1.80 | length 29.8
  Top Layer w0.203: U1.80 66.517,155.866 70.048,155.866 70.327,155.586 75.703,155.586 v2(75.819,155.702)
  Bottom Layer w0.203: P3.4 77.978,141.859 77.978,153.543 v2(75.819,155.702)
SDIO_CMD: P3.5 U1.83 | length 28.4
  Top Layer w0.203: U1.83 65.456,156.926 65.786,156.926 66.58,157.72 72.247,157.72 v2(72.379,157.852)
  Bottom Layer w0.203: v2(72.379,157.852) 77.597,152.634 77.597,144.272 75.057,141.732 P3.5
SDIO_D0: P3.3 U1.65 | length 19.2
  Top Layer w0.203: U1.65 69.192,141.861 69.192,138.453 v2(72.263,135.382)
  Bottom Layer w0.203: v2(72.263,135.382) 73.279,136.398 P3.3
SDIO_D1: P3.2 U1.66 | length 18.9
  Top Layer w0.203: U1.66 69.573,142.187 69.573,139.342 P3.2
SDIO_D2: P3.7 U1.78 | length 17.6
  Top Layer w0.203: U1.78 67.17,155.104 68.561,155.104 68.84,154.824 v2(69.077,154.824)
  Bottom Layer w0.203: v2(69.077,154.824) 72.379,154.824 76.835,150.368 76.835,148.336 P3.7
SDIO_D3: P3.6 U1.79 | length 22.1
  Top Layer w0.203: U1.79 66.843,155.485 69.89,155.485 70.4,154.975 74.246,154.975 v2(75.057,154.164)
  Bottom Layer w0.203: P3.6 77.216,146.177 77.216,152.005 v2(75.057,154.164)
SPI1_CS: P2.24 U1.33 | length 42.8
  Top Layer w0.203: U1.33 53.478,152.019 v2(55.915,152.019)
  Bottom Layer w0.203: P2.24 48.397,183.652 47.738,182.993 47.738,179.742 47.879,179.601 47.879,173.273 55.982,165.17 55.982,152.086 v2(55.915,152.019)
SPI1_MISO: P2.25 U1.31 | length 39.4
  Top Layer w0.203: v2(46.736,171.45) 46.736,171.958 v2(47.498,172.72) ; U1.31 49.579,149.459 53.283,153.163 53.593,153.163 53.95,153.52 v2(54.453,153.52)
  Bottom Layer w0.203: P2.25 46.228,180.631 47.498,179.36 v2(47.498,172.72) ; v2(46.736,171.45) 47.537,171.45 55.22,163.768 55.22,156.535 54.453,155.768 v2(54.453,153.52)
SPI1_MOSI: P2.26 U1.32 | length 42.9
  Top Layer w0.203: U1.32 53.533,152.781 v2(55.245,152.781)
  Bottom Layer w0.203: P2.26 45.085,182.509 45.085,174.199 47.224,172.06 47.467,172.06 55.601,163.926 55.601,156.377 55.245,156.021 v2(55.245,152.781)
SPI1_SCK: P2.23 U1.30 | length 38.8
  Top Layer w0.203: v2(46.968,170.391) 46.968,170.456 49.53,173.018 v2(49.53,173.083) ; U1.30 50.315,150.978 50.542,150.978 53.32,153.755 v2(53.32,153.823)
  Bottom Layer w0.203: v2(46.968,170.391) 47.675,170.391 54.839,163.227 54.839,156.693 53.32,155.174 v2(53.32,153.823) ; P2.23 48.768,179.524 49.53,178.762 v2(49.53,173.083)
SWCLK: JP1.2 U1.76 | length 62.6
  Top Layer w0.203: v2(52.578,130.81) 52.578,118.618 55.245,115.951 v2(55.245,113.919) ; v2(56.388,145.419) 62.942,151.973 65.453,151.973 U1.76
  Bottom Layer w0.203: JP1.2 42.291,113.919 v2(55.245,113.919) ; v2(52.578,130.81) 52.578,141.609 v2(56.388,145.419)
SWDIO: JP1.3 U1.72 | length 63.3
  Top Layer w0.203: v2(53.467,131.318) 53.467,118.268 57.319,114.416 v2(57.319,113.03) ; v2(57.353,144.272) 57.404,144.272 64.08,150.948 65.03,150.948 65.811,150.166 U1.72
  Bottom Layer w0.203: JP1.3 43.942,113.03 v2(57.319,113.03) ; v2(53.467,131.318) 53.467,140.386 v2(57.353,144.272)
UART1_RX: JP3.3 U1.69 | length 51
  Top Layer w0.203: U1.69 64.803,149.105 65.953,147.955 v2(66.709,147.955) ; v2(70.048,144.616) 72.277,142.387 v2(72.277,138.551)
  Bottom Layer w0.203: JP3.3 58.313,124.587 v2(72.277,138.551) ; v2(66.709,147.955) v2(70.048,144.616)
UART1_TX: JP3.2 U1.68 | length 47.1
  Top Layer w0.203: U1.68 66.04,147.135 v2(66.04,147.066) ; v2(69.203,143.902) 71.119,141.987 v2(71.119,139.953)
  Bottom Layer w0.203: JP3.2 58.766,127.127 71.119,139.479 v2(71.119,139.953) ; v2(66.04,147.066) v2@69.203,143.903
UART2_RX: JP2.3 U1.26 | length 21.9
  Top Layer w0.203: v2(42.672,153.986) 44.976,153.986 U1.26
  Bottom Layer w0.203: JP2.3 42.672,140.462 v2(42.672,153.986)
UART2_TX: JP2.2 U1.25 | length 22.7
  Top Layer w0.203: v2(40.363,155.078) 46.076,155.078 U1.25
  Bottom Layer w0.203: v2(40.363,155.078) 39.497,154.213 39.497,143.129 JP2.2
USB_DM: CON1.D- U1.53 | length 45.2
  Top Layer w0.203: CON1.D- 57.319,99.738 57.319,108.5 60.034,111.215 60.034,142.508 59.12,143.422 U1.53
USB_DP: CON1.D+ U1.54 | length 45.6
  Top Layer w0.203: CON1.D+ 57.96,108.602 60.534,111.177 60.534,142.715 59.474,143.775 U1.54
pads on no net: CON1.P$5 CON1.P$6 P1. P1.3 P2.29 P2.30 S1.6 S1.7 U1.5 U1.7 U1.8 U1.9 U1.15 U1.16 U1.17 U1.34 U1.52 U1.67 U1.70 U1.71 U1.77 U1.84 U1.95 U1.96 U1.97 U1.98 U2.24 U2.25 U2.26 U2.27

## Polygon pours and split planes (outlines as drawn)
GND on Bottom Layer "GND_L02_P002" (solid, remove dead copper, pour order 2): 27.813,188.341 ccw(c27.813,185.801) 25.273,185.801 25.273,96.52 ccw(c27.813,96.52) 27.813,93.98 100.076,93.98 ccw(c100.076,96.52) 102.616,96.52 102.616,185.801 ccw(c100.076,185.801) 100.076,188.341
GND on Top Layer "GND_L01_P003" (solid, remove dead copper, pour order 3): 27.813,188.341 ccw(c27.813,185.801) 25.273,185.801 25.273,96.52 ccw(c27.813,96.52) 27.813,93.98 100.076,93.98 ccw(c100.076,96.52) 102.616,96.52 102.616,185.801 ccw(c100.076,185.801) 100.076,188.341

## Keep-outs
Keep-Out Layer:
  the board outline again, w0.254

## Silkscreen, mask and mechanical layers (free items; w line width, h text height)
Top Overlay:
  circle w0.254: c100.305,169.852 r3
  circle w0.254: c33.122,184.07 r3
  circle w0.254: c82.194,97.543 r3
  circle w0.254: c33.147,97.663 r3
  lines w0.254: 85.458,94.232 85.458,169.631 85.458,187.284 29.858,187.284 29.858,94.284 85.458,94.284 ; 102.358,128.208 102.358,152.208 70.358,152.208 70.358,128.208 102.362,128.208
  text "VTRG" at 43.342,143.129 h1.52 r270
  text "VTRG" at 43.342,129.159 h1.52 r270
  text "VCDG" at 43.342,113.919 h1.52 r270
Bottom Overlay:
  circle w0.254: c100.305,169.852 r3
  circle w0.254: c33.122,184.07 r3
  circle w0.254: c82.194,97.543 r3
  circle w0.254: c33.147,97.663 r3

## Text inside footprints (layer, text, board x,y; h text height)
P2: Bottom Overlay "2" at 79.248,183.144 h1.27; Bottom Overlay "1" at 79.248,180.604 h1.27; Bottom Overlay "31" at 36.652,180.604 h1.27; Bottom Overlay "32" at 36.652,183.144 h1.27
P4: Top Overlay "+" at 29.083,161.544 h1.52 r90